# EAGLE board v001 (EAGLE 6.4)
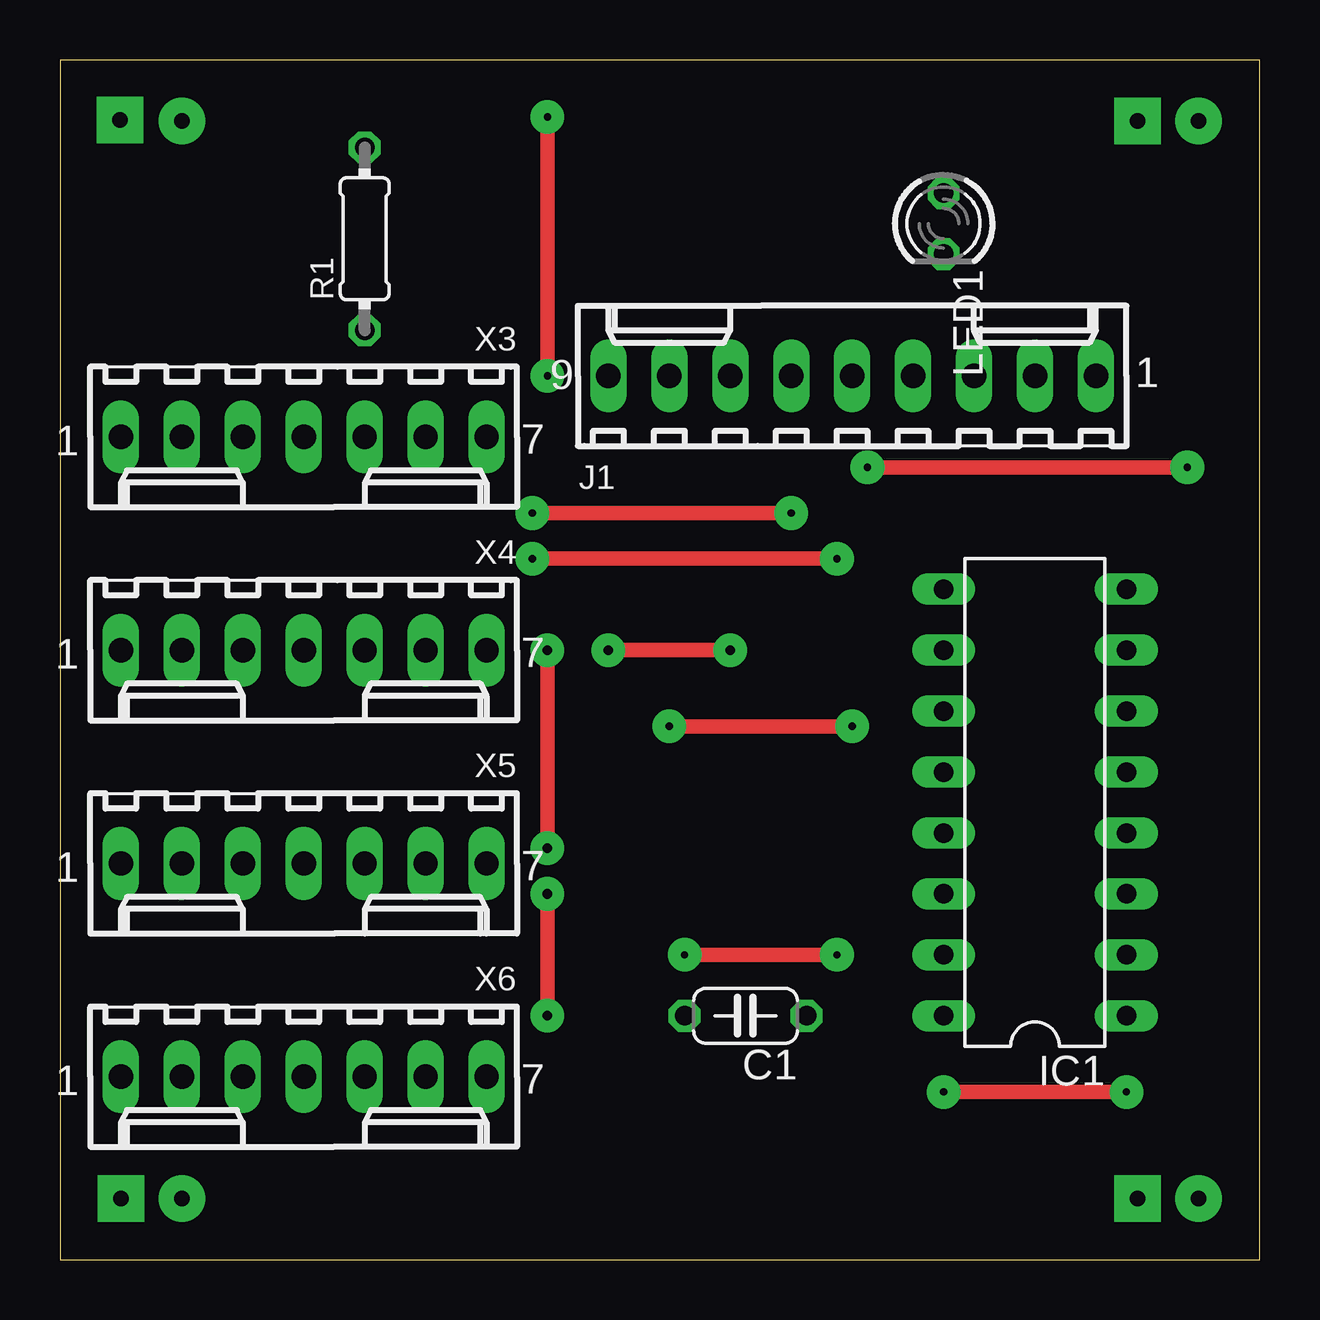
[diagram p0: board, top side]
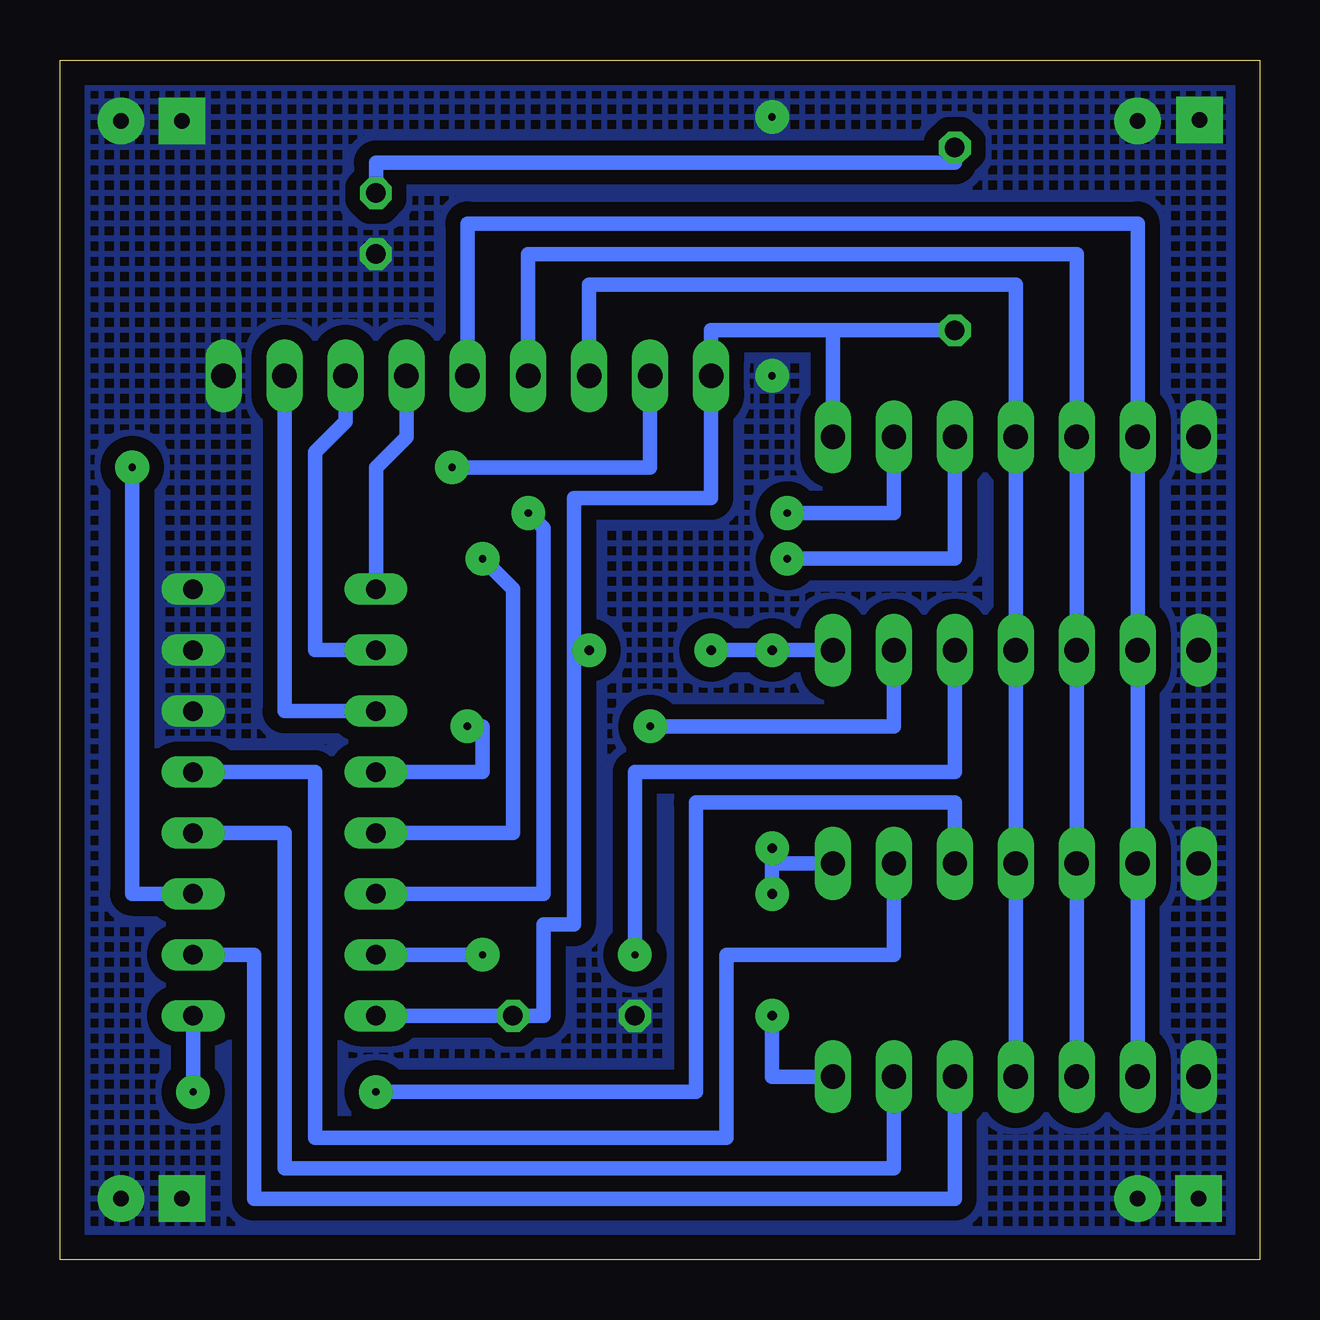
[diagram p1: board, bottom side, seen from below]

Size 50 x 50 mm. Coordinates in mm from the lower left corner, seen from the top.
Outline: 0,0 50,0 50,50 0,50 0,0
Copper layers (1*16): Top 0.035mm / dielectric 1.5mm / Bottom 0.035mm
Design rules "default": minimum track width 10mil, minimum drill 24mil, track to track 8mil, track to pad 8mil, pad to pad 8mil, via to via 8mil, smd to smd 8mil, copper to edge 40mil, drill to drill 8mil, minimum pad ring 10mil, minimum via ring 8mil, stop-mask expansion 4mil, vias tented up to drill 0mil, thermal gap 10mil

## Footprints (pad centres in the part's own frame; a part is rotated, then mirrored left to right if it is on the bottom)
C050-024X044 = drill 0.813 octagon: 1 -2.54,0; 2 2.54,0
DIL16 = drill 0.813 long: 1 -8.89,-3.81; 2 -6.35,-3.81; 3 -3.81,-3.81; 4 -1.27,-3.81; 5 1.27,-3.81; 6 3.81,-3.81; 7 6.35,-3.81; 8 8.89,-3.81; 9 8.89,3.81; 10 6.35,3.81; 11 3.81,3.81; 12 1.27,3.81; 13 -1.27,3.81; 14 -3.81,3.81; 15 -6.35,3.81; 16 -8.89,3.81
6410-09 = drill 1.016 long: 1 10.16,0; 2 7.62,0; 3 5.08,0; 4 2.54,0; 5 0,0; 6 -2.54,0; 7 -5.08,0; 8 -7.62,0; 9 -10.16,0
LED3MM = drill 0.813 octagon: A -1.27,0; K 1.27,0
ZZZ_MODULE_05X05 = drill 0.64 pad 1.93 square: GND@1 2.5,47.5; GND@2 44.92,47.46; GND@7 2.54,2.54; GND@8 44.92,2.54 | drill 0.64 pad 1.93: GND@3 47.46,47.46; GND@4 5.08,47.46; GND@5 47.46,2.54; GND@6 5.08,2.54
0204/7 = drill 0.813 octagon: 1 -3.81,0; 2 3.81,0
6410-07 = drill 1.016 long: 1 7.62,0; 2 5.08,0; 3 2.54,0; 4 0,0; 5 -2.54,0; 6 -5.08,0; 7 -7.62,0

## Placement (x,y rotation side)
C1  0.1uF  [C050-024X044]  28.57,10.16 180 top
IC1  4051N  [DIL16]  40.64,19.05 90 top
J1  To Arduino Shield  [6410-09]  33.02,36.83 0 top
LED1  Green  [LED3MM]  36.83,43.18 270 top
PCB1  ZZZ_MODULE05X05  [ZZZ_MODULE_05X05]  0,0 0 top
R1  470R  [0204/7]  12.7,42.55 90 top
X3  Sec 12  [6410-07]  10.16,34.29 180 top
X4  Sec 34  [6410-07]  10.16,25.4 180 top
X5  Sec 56  [6410-07]  10.16,16.51 180 top
X6  Sec 78  [6410-07]  10.16,7.62 180 top

## Library data of the parts
C1 R1 = rcl
IC1 = 40xx
J1 X3-X6 = con-molex; OC_FARNELL: unknown; OC_NEWARK: unknown
LED1 = led
PCB1 = GNLib

## Nets
+5V: C1.1 IC1.16 J1.9 R1.1 X3.7 X4.7 X5.7 X6.7
GND: C1.2 IC1.6 IC1.7 IC1.8 J1.1 LED1.K PCB1.GND@1 PCB1.GND@2 PCB1.GND@3 PCB1.GND@4 PCB1.GND@5 PCB1.GND@6 PCB1.GND@7 PCB1.GND@8 X3.1 X4.1 X5.1 X6.1
INPUT_READ: IC1.3 J1.8
N$1: LED1.A R1.2
SECONDARY_1: IC1.13 X3.5
SECONDARY_2: IC1.14 X3.6
SECONDARY_3: IC1.15 X4.5
SECONDARY_4: IC1.12 X4.6
SECONDARY_5: IC1.1 X5.5
SECONDARY_6: IC1.5 X5.6
SECONDARY_7: IC1.2 X6.5
SECONDARY_8: IC1.4 X6.6
SELECT_A: IC1.11 J1.2
SELECT_B: IC1.10 J1.3
SELECT_C: IC1.9 J1.4
SELECT_D: J1.5 X3.2 X4.2 X5.2 X6.2
SELECT_E: J1.6 X3.3 X4.3 X5.3 X6.3
SELECT_F: J1.7 X3.4 X4.4 X5.4 X6.4

## Tracks (layer width: path | path; a pad name or v marks a point on that pad's centre or on a via)
+5V  (via drill 0.4 pad 1.4)
  Top 0.61: v20.32,10.16 v20.32,15.24 | v20.32,17.14 v20.32,25.4 | v22.86,25.4 v27.94,25.4
  Bottom 0.61: 17.78,38.73 22.86,38.73 J1.9 22.86,31.75 28.57,31.75 28.57,25.4 | 17.78,38.73 R1.1 | IC1.16 C1.1 29.84,10.16 29.84,13.97 28.57,13.97 28.57,25.4 | X6.7 20.32,7.62 v20.32,10.16 | v20.32,15.24 20.32,16.51 | 20.32,16.51 v20.32,17.14 | X4.7 v20.32,25.4 v22.86,25.4 | X5.7 20.32,16.51 | v27.94,25.4 28.57,25.4 | X3.7 17.78,38.73
GND  (via drill 0.3 pad 1.4)
  Top 0.61: v20.32,47.62 v20.32,36.83
  pour Bottom (isolate 0.61, no thermals, hatched): 0,0 50,0 50,50 0,50
INPUT_READ  (via drill 0.3 pad 1.4)
  Top 0.61: v33.66,33.02 v46.99,33.02
  Bottom 0.61: J1.8 25.4,33.02 v33.66,33.02 | v46.99,33.02 46.99,15.24 IC1.3
N$1
  Bottom 0.61: R1.2 12.7,45.72 36.83,45.72 LED1.A
SECONDARY_1  (via drill 0.3 pad 1.4)
  Top 0.61: v19.68,29.21 v32.38,29.21
  Bottom 0.61: X3.5 12.7,29.21 v19.68,29.21 | IC1.13 31.11,17.78 31.11,27.94 v32.38,29.21
SECONDARY_2  (via drill 0.3 pad 1.4)
  Top 0.61: v19.68,31.11 v30.48,31.11
  Bottom 0.61: X3.6 15.24,31.11 v19.68,31.11 | IC1.14 29.84,15.24 29.84,30.48 v30.48,31.11
SECONDARY_3  (via drill 0.3 pad 1.4)
  Top 0.61: v26.04,12.7 v32.38,12.7
  Bottom 0.61: X4.5 12.7,20.32 26.04,20.32 v26.04,12.7 | v32.38,12.7 IC1.15
SECONDARY_4  (via drill 0.3 pad 1.4)
  Top 0.61: v25.4,22.23 v33.02,22.23
  Bottom 0.61: X4.6 15.24,22.23 v25.4,22.23 | v33.02,22.23 32.38,22.23 32.38,20.32 IC1.12
SECONDARY_5  (via drill 0.3 pad 1.4)
  Top 0.61: v36.83,6.99 v44.45,6.99
  Bottom 0.61: X5.5 12.7,19.05 23.5,19.05 23.5,6.99 v36.83,6.99 | v44.45,6.99 IC1.1
SECONDARY_6
  Bottom 0.61: IC1.5 39.37,20.32 39.37,5.08 22.23,5.08 22.23,12.7 15.24,12.7 X5.6
SECONDARY_7
  Bottom 0.61: IC1.2 41.91,12.7 41.91,2.54 12.7,2.54 X6.5
SECONDARY_8
  Bottom 0.61: IC1.4 40.64,17.78 40.64,3.81 15.24,3.81 X6.6
SELECT_A
  Bottom 0.61: IC1.11 40.64,22.86 J1.2
SELECT_B
  Bottom 0.61: J1.3 38.1,34.92 39.37,33.66 39.37,25.4 IC1.10
SELECT_C
  Bottom 0.61: J1.4 35.56,34.29 36.83,33.02 IC1.9
SELECT_D
  Bottom 0.61: X6.2 X5.2 X4.2 X3.2 5.08,43.18 33.02,43.18 J1.5
SELECT_E
  Bottom 0.61: J1.6 30.48,41.91 7.62,41.91 X3.3 X4.3 X5.3 X6.3
SELECT_F
  Bottom 0.61: X6.4 X5.4 X4.4 X3.4 10.16,40.64 27.94,40.64 J1.7